# EAGLE board Funky_v3_r3 (EAGLE 6.5.0)
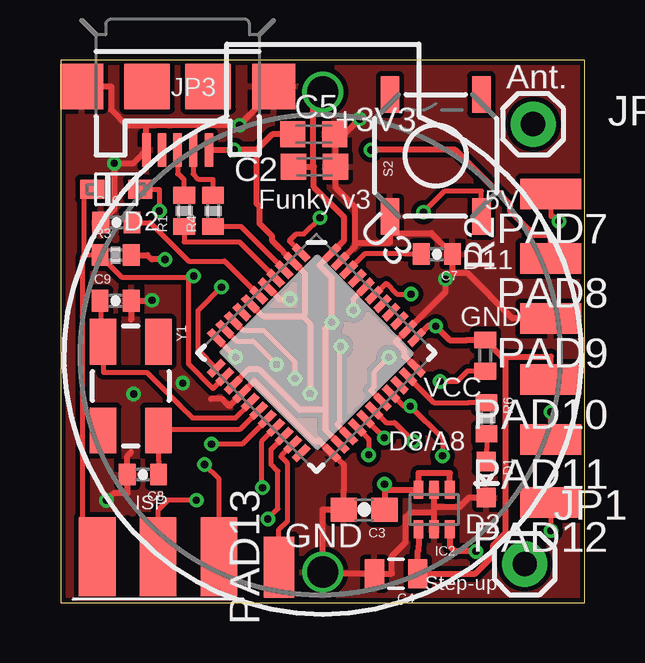
[diagram p0: board, top side]
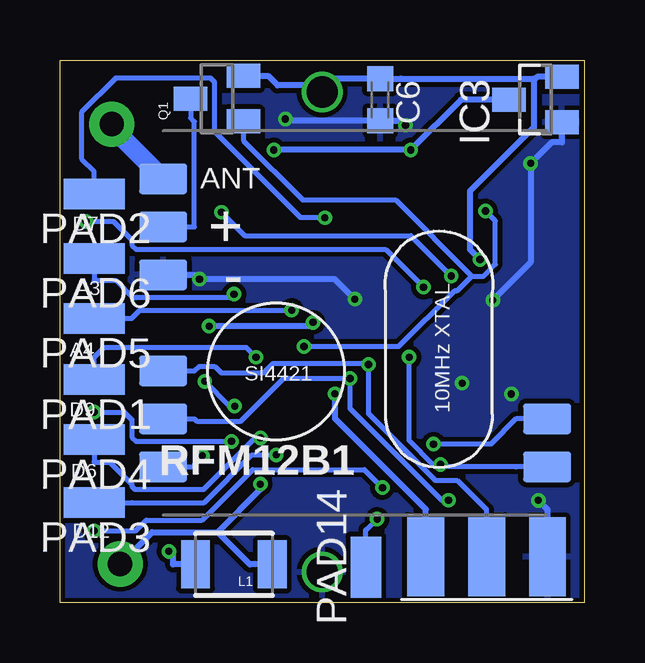
[diagram p1: board, bottom side, seen from below]

Size 21.84 x 22.61 mm. Coordinates in mm from the lower left corner, seen from the top.
Outline: 0,0 21.84,0 21.84,22.61 0,22.61 0,0
Copper layers (1*16): Top 0.035mm / dielectric 1.5mm / Bottom 0.035mm
Design rules "default": minimum track width 0.2mm, minimum drill 0.3mm, track to track 0.2mm, track to pad 0.2mm, pad to pad 0.2mm, via to via 0.2mm, smd to smd 0.2mm, copper to edge 0.2mm, drill to drill 0.2mm, minimum pad ring 0.2mm, minimum via ring 0.15mm, stop-mask expansion 0.075mm, vias tented up to drill 0.3mm, thermal gap 0.2mm
Net classes: 1 power: width 0.254 mm, clearance 0.203 mm
tRestrict: 2 lines
bRestrict: 2 lines

## Footprints (pad centres in the part's own frame; a part is rotated, then mirrored left to right if it is on the bottom)
BATTCOM_20MM_PTH = drill 1.3: 1 20,0; 2 0,0
C0603K = smd 1.05 x 1.08: 1 -0.875,0; 2 0.875,0
0603-CAP = smd 1.1 x 1: 1 -0.85,0; 2 0.85,0
0805 = smd 0.8 x 1.2: 1 -0.9,0; 2 0.9,0
0402-CAP = smd 0.7 x 0.9: 1 -0.65,0; 2 0.65,0
LED-0603 = smd 0.8 x 0.8: A 0,-0.75; C 0,0.75
SOD-323F = smd 1 x 0.8: A -1,0; C 1,0
SC70 = smd 0.4 x 0.75: 1 -0.65,-0.825; 2 0,-0.825; 3 0.65,-0.825; 4 0.65,0.825; 5 0,0.825; 6 -0.65,0.825
SOT23 = smd 1 x 1.4: 1 -0.95,-1.1; 2 0.95,-1.1; 3 0,1.1
1X01 = drill 1.016 pad 1.88: 1 0,0
USB-MICROB = smd 0.35 x 1.4: D+ 0,2.65; D- -0.65,2.65; GND 1.3,2.65; ID 0.65,2.65; VBUS -1.3,2.65 | smd 1.8 x 1.9: MT1 -4,0; MT2 4,0 | smd 1.9 x 1.9: P$1 -1.27,0; P$2 1.27,0
1210 = smd 1.2 x 2: 1 -1.6,0; 2 1.6,0
SMD1,27-2,54 = smd 1.27 x 2.54: 1 0,0
0402-RES = smd 0.7 x 0.9: 1 -0.65,0; 2 0.65,0
R0402 = smd 0.7 x 0.9: 1 -0.65,0; 2 0.65,0
RFM12B-MINPADS = smd 2 x 1.27: ANT 8,-6; GND 8,-2; IRQ -8,4; SCK 8,4; SDI 8,2; SDO -8,6; SEL 8,6; VDD 8,-4
TACTILE_SWITCH_SMD = smd 1.524 x 0.762: 1 -2.54,1.905; 2 2.54,1.905; 3 -2.54,-1.905; 4 2.54,-1.905
QFN-44-NOPAD = smd 0.8 x 0.3: 1 -3.4,2.5; 2 -3.4,2; 3 -3.4,1.5; 4 -3.4,1; 5 -3.4,0.5; 6 -3.4,0; 7 -3.4,-0.5; 8 -3.4,-1; 9 -3.4,-1.5; 10 -3.4,-2; 11 -3.4,-2.5; 23 3.4,-2.5; 24 3.4,-2; 25 3.4,-1.5; 26 3.4,-1; 27 3.4,-0.5; 28 3.4,0; 29 3.4,0.5; 30 3.4,1; 31 3.4,1.5; 32 3.4,2; 33 3.4,2.5 | smd 0.3 x 0.8: 12 -2.5,-3.4; 13 -2,-3.4; 14 -1.5,-3.4; 15 -1,-3.4; 16 -0.5,-3.4; 17 0,-3.4; 18 0.5,-3.4; 19 1,-3.4; 20 1.5,-3.4; 21 2,-3.4; 22 2.5,-3.4; 34 2.5,3.4; 35 2,3.4; 36 1.5,3.4; 37 1,3.4; 38 0.5,3.4; 39 0,3.4; 40 -0.5,3.4; 41 -1,3.4; 42 -1.5,3.4; 43 -2,3.4; 44 -2.5,3.4
6PAD_ISP = smd 1.524 x 3.302 bottom: GND 2.54,0; MOSI 0,0; VCC -2.54,0 | smd 1.524 x 3.302: MISO -2.54,0; RST 2.54,0; SCK 0,0
CRYSTAL-SMD-5X3 = smd 1.9 x 1.1: 1 -1.85,-1.15; 2 1.85,-1.15; 3 1.85,1.15; 4 -1.85,1.15

## Placement (x,y rotation side)
BAT2  [BATTCOM_20MM_PTH]  10.92,1.27 90 top
C2  100nF  [C0603K]  10.57,18.16 0 top
C3  1µ  [0603-CAP]  12.64,3.87 180 top
C4  10µ  [0805]  13.97,1.21 180 top
C5  1uF  [C0603K]  10.54,19.51 0 top
C6  1u  [C0603K]  8.51,20.96 270 bottom
C7  100nF  [0402-CAP]  15.67,14.52 180 top
C8  22pF  [0402-CAP]  3.43,5.33 180 top
C9  22pF  [0402-CAP]  2.29,12.57 0 top
C10  1uF  [0402-CAP]  2.32,15.84 0 top
D1  Green  [LED-0603]  17.74,5.12 180 top
D2  [SOD-323F]  2.31,17.22 180 top
IC2  LTC3525  [SC70]  15.56,3.88 180 top
IC3  MCP1703CB  [SOT23]  2.03,20.96 90 bottom
JP1  M01PTH  [1X01]  19.34,1.6 0 top
JP2  M01PTH  [1X01]  19.69,19.94 0 top
JP3  USB-MICROB  [USB-MICROB]  4.87,21.51 180 top
L1  10 µH  [1210]  14.6,1.59 180 bottom
PAD1  [SMD1,27-2,54]  20.42,9.28 90 bottom
PAD2  [SMD1,27-2,54]  20.42,17.03 90 bottom
PAD3  [SMD1,27-2,54]  20.42,4.16 90 bottom
PAD4  [SMD1,27-2,54]  20.42,6.79 90 bottom
PAD5  [SMD1,27-2,54]  20.42,11.84 90 bottom
PAD6  [SMD1,27-2,54]  20.42,14.34 90 bottom
PAD7  [SMD1,27-2,54]  20.42,17.03 90 top
PAD8  [SMD1,27-2,54]  20.42,14.34 90 top
PAD9  [SMD1,27-2,54]  20.42,11.84 90 top
PAD10  [SMD1,27-2,54]  20.42,9.28 90 top
PAD11  [SMD1,27-2,54]  20.42,6.79 90 top
PAD12  [SMD1,27-2,54]  20.42,4.16 90 top
PAD13  [SMD1,27-2,54]  9.1,1.48 0 top
PAD14  [SMD1,27-2,54]  9.1,1.48 0 bottom
Q1  P-MOSFET  [SOT23]  15.3,21 90 bottom
R1  22  [0402-RES]  5.15,16.32 90 top
R2  100K  [R0402]  17.69,10.29 90 top
R3  10K  [0402-RES]  2.29,14.48 0 top
R4  22  [0402-RES]  6.35,16.32 90 top
R6  330  [0402-RES]  17.74,7.68 270 top
RFM12B1  RFM12B_MINPADS  [RFM12B-MINPADS]  9.54,11.65 180 bottom
S2  !RESET  [TACTILE_SWITCH_SMD]  15.62,18.63 90 top
U3  ATMEGA32U4  [QFN-44-NOPAD]  10.66,10.4 315 top
U$2  AVR-ISP-6-EDGE  [6PAD_ISP]  4.06,1.9 180 top
Y1  8MHz  [CRYSTAL-SMD-5X3]  2.92,9.02 270 top

## Library data of the parts
BAT2 C3 C4 C7-C10 D1 JP1 JP2 L1 Q1 R1 R3 R4 R6 U3 Y1 = SparkFun
C2 C5 C6 = rcl
D2 = adafruit
IC2 = JeeLabs
IC3 = linear
JP3 = SparkFun-Connectors; PROD_ID: CONN-09505
PAD1-PAD14 = wirepad
R2 = resistor
RFM12B1 = LowPowerLab
S2 = SparkFun-Electromechanical; PROD_ID: SWCH-08247
U$2 = avr-7

## Nets
A0: U3.36
A1: U3.37
A2: U3.38
A3: PAD6.1 U3.39
A4: PAD5.1 U3.40
A5: U3.41
AREF: C7.2 U3.42
D2: PAD12.1 U3.19
D3: RFM12B1.IRQ U3.18
D4: D2.A Q1.1 U3.25
D5: U3.31
D6: PAD4.1 U3.27
D7: PAD2.1 U3.1
D8: PAD11.1 U3.28
D9: PAD1.1 U3.29
D10: R2.1 RFM12B1.SEL U3.30
D11: PAD7.1 U3.12
D12: PAD3.1 U3.26
D13: R6.1 U3.32
D+: JP3.D+ R1.2
D-: JP3.D- R4.2
GND [power]: BAT2.2 C2.2 C3.2 C4.2 C5.2 C6.2 C7.1 C8.2 C9.2 C10.1 D1.C IC2.2 IC2.5 IC3.1 JP3.GND JP3.MT1 JP3.MT2 PAD9.1 RFM12B1.GND S2.1 U3.5 U3.15 U3.23 U3.33 U3.35 U3.43 U$2.GND
MISO: RFM12B1.SDO U3.11 U$2.MISO
MOSI: RFM12B1.SDI U3.10 U$2.MOSI
N$1: C9.1 U3.16 Y1.1
N$2: R1.1 U3.4
N$3: JP2.1 RFM12B1.ANT
N$4: C8.1 U3.17 Y1.3
N$5: C10.2 U3.6
N$6: D1.A R6.2
N$7: R4.1 U3.3
N$10: Q1.3 RFM12B1.VDD
N$13 [power]: IC2.6 L1.2
RESET: D2.C R3.1 S2.3 U3.13 U$2.RST
RXI: PAD14.1 U3.20
RXLED: U3.8
SCK: RFM12B1.SCK U3.9 U$2.SCK
TXLED: U3.22
TXO: PAD13.1 U3.21
VBUS [power]: C5.1 IC3.3 JP3.VBUS PAD8.1 U3.2 U3.7 U$2.VCC
VCC [power]: BAT2.1 C2.1 C4.1 C6.1 IC2.4 IC3.2 PAD10.1 Q1.2 R2.2 R3.2 U3.14 U3.24 U3.34 U3.44
VIN [power]: C3.1 IC2.1 IC2.3 JP1.1 L1.1

## Tracks (layer width: path | path; a pad name or v marks a point on that pad's centre or on a via)
A3  (via drill 0.3 pad 0.6)
  Top 0.2: U3.39 13.08,12.79 U3.39 | U3.39 13.56,13.3 14.01,12.85 v14.6,12.85
  Bottom 0.2: PAD6.1 20.42,13.41 19.49,13.41 18.78,12.7 14.75,12.7 v14.6,12.85
A4  (via drill 0.3 pad 0.6)
  Top 0.2: U3.40 12.19,12.64 v12.19,12.18 | U3.40 12.78,13.19 U3.40
  Bottom 0.2: PAD5.1 18.85,11.84 18.52,12.18 v12.19,12.18
AREF
  Top 0.2: 12.06,13.92 12.66,14.53 14.36,14.53 14.37,14.52 C7.2 | 12.06,13.92 U3.42 12.08,13.89 12.06,13.92
D2  (via drill 0.3 pad 0.6)
  Top 0.2: U3.19 8.37,6.7 8.37,4.83 v8.41,4.79 | v20.42,2.99 20.42,3.23 PAD12.1 | U3.19 8.98,7.29 U3.19
  Bottom 0.2: v20.42,2.99 18.68,2.99 18.24,3.43 15.93,3.43 13.82,5.54 9.16,5.54 v8.41,4.79
D3  (via drill 0.3 pad 0.6)
  Top 0.2: U3.18 | U3.18 7.57,6.6 v6.29,6.6 | U3.18 8.68,7.69 U3.18
  Bottom 0.2: RFM12B1.IRQ 2.84,7.65 3.89,6.6 v6.29,6.6
D4  (via drill 0.3 pad 0.6)
  Top 0.2: 11.96,6.97 U3.25 11.98,6.99 11.96,6.97 | 11.96,6.97 11.51,7.43 11.63,7.56 11.63,10.63 v11.67,10.67 | v4.11,16.31 4.11,17.22 D2.A
  Bottom 0.2: 4.69,13.61 4.19,13.61 3.7,14.09 3.7,15.9 v4.11,16.31 | 4.69,13.61 7.86,16.78 11.74,16.78 14.2,19.25 Q1.1 | v11.67,10.67 7.72,10.67 5.39,13 5.29,13 4.69,13.61
D6  (via drill 0.3 pad 0.6)
  Top 0.2: U3.27 v13.49,6.86 | U3.27 12.68,7.69 U3.27 | U3.27
  Bottom 0.2: v13.49,6.86 13.7,6.86 15.85,4.72 18.73,4.72 18.85,4.84 18.85,4.93 19.77,5.85 20.42,5.85 PAD4.1
D7  (via drill 0.3 pad 0.6)
  Top 0.2: U3.1 9.53,15.07 9.82,15.36 10.13,15.36 v10.81,16.04 | U3.1 10.08,14.59 U3.1
  Bottom 0.2: PAD2.1 20.42,17.96 20.96,18.5 20.96,20.42 19.53,21.85 15.57,21.85 15.4,21.68 15.4,19.62 11.82,16.04 v10.81,16.04
D8  (via drill 0.3 pad 0.6)
  Top 0.2: v14.7,6.72 13.91,7.5 13.56,7.5 U3.28 | U3.28 13.08,7.99 U3.28 | PAD11.1 v20.42,7.94
  Bottom 0.2: v20.42,7.94 19.16,7.94 18.84,7.62 18.84,6.89 18.67,6.72 v14.7,6.72
D9  (via drill 0.3 pad 0.6)
  Top 0.2: 13.38,8.39 U3.29 13.38,8.39 | 13.38,8.39 12.92,8.84 13.07,8.99 13.07,9.61 v13.68,10.22
  Bottom 0.2: PAD1.1 20.42,10.22 20.02,10.63 14.08,10.63 v13.68,10.22
D10  (via drill 0.3 pad 0.6)
  Top 0.2: v15.91,6.11 15.91,6.84 v14.57,8.18 14.29,8.18 13.78,8.69 | 13.78,8.69 U3.30 13.78,8.69 | v15.81,9.22 16.52,9.22 16.94,9.64 R2.1
  Bottom 0.2: RFM12B1.SEL 16.24,5.65 16.24,5.78 v15.91,6.11 | v15.81,9.22 14.78,8.18 v14.57,8.18
D11  (via drill 0.3 pad 0.6)
  Top 0.2: U3.12 5.72,10.53 5.72,12.17 v6.7,13.14 | v20.76,15.89 20.55,16.09 20.42,16.09 PAD7.1 | U3.12 6.58,9.79 U3.12
  Bottom 0.2: v20.76,15.89 19.62,15.89 18.85,15.11 18.85,14.9 18.67,14.72 8.27,14.72 v6.7,13.14
D12  (via drill 0.3 pad 0.6)
  Top 0.2: 12.37,7.28 U3.26 12.38,7.29 12.37,7.28 | 12.37,7.28 12.85,6.79 12.83,6.78 v12.83,6.15
  Bottom 0.2: v12.83,6.15 13.85,6.15 15.83,4.16 18.85,4.16 PAD3.1
D13
  Top 0.2: 14.49,9.4 U3.32 14.48,9.39 14.49,9.4 | 14.49,9.4 15.55,8.33 16.99,8.33 R6.1
D+
  Top 0.2: JP3.D+ 4.87,17.86 4.91,17.86 5.15,17.62 R1.2
D-
  Top 0.2: JP3.D- 5.52,17.86 5.76,17.62 6.35,17.62 R4.2
GND  (via drill 0.3 pad 0.6)
  Top 0.254: U3.5 9.12,12.64 v9.56,12.64 | 16.32,13.74 16.06,13.47 v16.03,13.47 16.03,12.95 U3.35 | U3.33 14.31,10.28 14.31,10.52 13.96,10.87 14.38,11.3 | U3.35 14.38,11.3 | JP3.MT2 2.1,21.51 2.1,20.55 2.76,19.89 3.57,19.89 | C10.1 2.23,16.4 v2.23,18.3 3.01,18.3 JP3.GND 3.57,19.89 | 3.57,19.89 v7.45,19.89 8.87,21.31 JP3.MT1 | 2.94,6.27 2.78,6.11 C8.2 2.78,4.94 2.78,4.55 2.21,4.55 v1.91,4.26 | 6.26,8.48 6.71,8.48 6.91,8.29 6.93,8.29 7.03,8.19 U3.15 | 16.32,13.74 16.93,13.74 18.82,11.84 PAD9.1 | v3.81,12.6 3.64,12.6 3.62,12.57 C9.2 2.94,11.79 | D1.C 17.01,4.37 16.62,3.99 15.56,3.99 | 15.56,3.99 IC2.2 | 15.56,3.76 15.56,3.99 | 15.56,3.76 14.57,3.76 14.38,3.56 14.38,2.51 13.8,1.94 13.8,1.21 C4.2 10.99,1.21 BAT2.2 10.91,3.87 C3.2 11.79,4.7 11.81,4.71 11.81,5.71 11.55,5.97 U3.23 | IC2.5 15.56,3.76 | 13.72,15.39 15.45,15.39 C7.1 16.32,13.74 | 13.72,15.39 13.72,15 12.27,15 | S2.1 13.72,15.39 | 12.27,15 12.27,16.48 11.45,17.29 C2.2 11.45,19.34 11.62,19.51 | 12.27,15 12.27,14.84 12.1,14.67 U3.43 | 11.62,19.51 11.81,19.51 v12.46,20.15 | C5.2 11.62,19.51 | U3.23 10.78,6.75 10.54,6.75 8.06,9.22 U3.15 | U3.23 11.28,6.19 U3.23 | 14.38,11.3 14.38,11.29 U3.35 | U3.5 8.58,13.19 U3.5 | U3.33 14.88,9.79 U3.33 | U3.15 | U3.43
  Bottom 0.254: v9.56,12.64 10.4,13.48 v16.03,13.48 v16.03,13.47 16.21,13.65 RFM12B1.GND | v3.81,12.6 2.23,14.17 v2.23,18.3 1.36,19.18 0.93,19.18 IC3.1 | v7.45,19.89 7.64,20.08 C6.2 8.77,20.08 9.38,20.08 12.39,20.08 v12.46,20.15 | U$2.GND 1.52,3.89 1.54,3.89 v1.91,4.26
  other vias: 5.09,9.14 3.04,8.69
  pour Top: -0.7,23.17 -0.7,-0.7 22.22,-0.7 22.22,23.17
  pour Bottom: -1.4,23.94 -1.4,-1.34 22.92,-1.34 22.92,24.13 -1.34,24.13
MISO  (via drill 0.3 pad 0.6)
  Top 0.2: v5.99,5.75 6.6,5.14 6.6,3.86 U$2.MISO | U3.11 v7.3,10.23 | U3.11 6.48,11.09 U3.11
  Bottom 0.2: v7.3,10.23 7.3,6.75 6.3,5.75 v5.99,5.75 5.89,5.65 2.84,5.65 RFM12B1.SDO
MOSI  (via drill 0.3 pad 0.6)
  Top 0.2: v8.99,9.92 8.02,10.89 7.33,10.89 6.86,11.37 | 6.86,11.37 U3.10 6.88,11.39 6.86,11.37
  Bottom 0.2: U$2.MOSI 4.06,3.86 5.3,5.09 6.2,5.09 8.99,7.88 v8.99,9.92 9.04,9.97 12.96,9.97 13.36,9.56 15.12,9.56 15.4,9.84 16.05,9.84 16.24,9.65 RFM12B1.SDI
N$1
  Top 0.2: U3.16 | U3.16 7.98,8.39 U3.16 | U3.16 | U3.16 7.88,8.29 7.28,7.69 5.5,7.69 4.98,8.19 3.58,9.59 1.78,9.59 1.78,10.79 Y1.1 1.68,10.89 1.68,12.49 C9.1
N$2
  Top 0.2: R1.1 5.15,15.02 7.45,15.02 8.88,13.59 | 8.88,13.59 U3.4 8.88,13.59
N$3
  Bottom 0.813: RFM12B1.ANT 19.69,19.79 JP2.1
N$4
  Top 0.2: U3.17 7.48,7.23 4.13,7.23 Y1.3 4.07,7.06 4.07,5.92 4.08,5.91 C8.1 | U3.17 8.28,7.99 U3.17
N$5
  Top 0.2: C10.2 3.73,15.84 5.34,14.22 6.83,14.22 8.18,12.88 | 8.18,12.88 U3.6 8.18,12.89 8.18,12.88
N$6
  Top 0.2: R6.2 17.74,6.38 17.74,6.37 D1.A
N$7
  Top 0.2: R4.1 7.51,15.67 9.29,13.89 | 9.29,13.89 U3.3 9.28,13.89 9.29,13.89
N$10
  Bottom 0.2: RFM12B1.VDD 16.24,15.65 16.24,20.04 16.4,20.2 Q1.3
N$13  (via drill 0.3 pad 0.6)
  Top 0.254: IC2.6 16.21,2.35 16.43,2.13 v17.31,2.13
  Bottom 0.254: L1.2 17.13,1.59 17.13,1.95 v17.31,2.13
RESET  (via drill 0.3 pad 0.6)
  Top 0.2: 5.32,13.56 5.5,13.56 v5.54,13.6 | 5.32,13.56 2.56,13.56 R3.1 0.99,14.48 | 5.32,13.56 5.32,9.94 6.34,8.91 U3.13 | S2.3 17.53,17.15 16.01,17.15 v15.12,16.26 | U$2.RST 0.92,2.51 0.92,14.41 0.99,14.48 | 0.99,14.48 0.99,16.89 D2.C | U3.13 6.88,9.49 U3.13
  Bottom 0.2: v15.12,16.26 14.15,15.29 7.23,15.29 v5.54,13.6
RXI  (via drill 0.3 pad 0.6)
  Top 0.2: v8.63,3.48 9.05,3.9 9.05,5.47 8.77,5.76 8.77,6.39 U3.20 | U3.20 9.38,6.99 U3.20
  Bottom 0.2: v8.63,3.48 9.06,3.05 9.1,3.05 PAD14.1
SCK  (via drill 0.3 pad 0.6)
  Top 0.2: U$2.SCK 4.06,3.86 4.47,4.26 v5.66,4.26 | U3.9 7.58,11.35 8.45,11.35 9.76,10.04 v9.76,9.34 | U3.9 7.18,11.79 U3.9
  Bottom 0.2: v5.66,4.26 5.94,4.26 9.76,8.09 v9.76,9.34 12.53,9.34 14.3,7.56 16.15,7.56 16.24,7.65 RFM12B1.SCK
TXO
  Top 0.2: PAD13.1 9.1,3.05 9.45,3.4 9.45,5.8 9.17,6.09 U3.21 | U3.21 9.68,6.59 U3.21
VBUS  (via drill 0.3 pad 0.6)
  Top 0.254: 10.08,11.93 10.19,12.04 10.19,13.7 10.18,13.7 9.69,14.2 | 10.08,11.93 10.39,11.62 v10.39,8.7 | v12.93,18.86 16.45,18.86 18.72,16.58 18.72,16.31 19.73,15.3 20.42,15.3 PAD8.1 | 8.16,18.86 v7.23,18.86 JP3.VBUS | 8.16,18.86 8.81,19.51 C5.1 | 8.16,18.86 8.16,16.62 8.29,16.49 8.29,15.79 8.81,15.27 8.81,15.08 9.15,14.73 9.41,14.48 U3.2 | 10.08,11.93 8.42,11.93 U3.7 | U3.2 9.69,14.2 | U3.7 7.88,12.49 U3.7 | 9.69,14.2 9.68,14.19 U3.2
  Bottom 0.254: v10.39,8.7 10.39,7.67 6.6,3.89 U$2.VCC | v12.93,18.86 v7.23,18.86 5.13,20.96 IC3.3
VCC  (via drill 0.3 pad 0.6)
  Top 0.254: 11.02,8.03 11.02,7.21 U3.24 | 11.02,8.03 11.02,11.4 v11.3,11.68 11.3,13.53 10.78,14.05 U3.44 | 11.02,8.03 9.96,8.03 8.28,9.71 7.85,9.71 U3.14 | R3.2 3.62,14.48 3.8,14.3 v4.35,14.3 | 10.52,18.16 10.52,20.87 BAT2.1 | 10.52,18.16 10.55,18.16 10.55,17.31 11.81,16.05 11.81,15.09 U3.44 | 10.52,18.16 10.43,18.16 C2.1 | 18.55,10.25 18.55,2.91 18.01,2.38 18.01,1.94 17.27,1.21 C4.1 14.87,2.14 14.91,2.17 14.91,2.35 IC2.4 | 14.88,11.09 U3.34 14.88,11.09 | 14.88,11.09 15.35,11.55 15.59,11.55 v15.63,11.52 16.21,10.94 16.91,10.94 R2.2 18.38,10.25 18.55,10.25 | 18.55,10.25 20.42,10.25 PAD10.1 | U3.44 11.28,14.59 U3.44 | 14.88,11.09 | U3.24
  Bottom 0.254: v11.3,11.68 11.46,11.52 v15.63,11.52 | 2.1,21.83 2.1,19.8 4.76,17.14 4.76,14.71 v4.35,14.3 | 2.1,21.83 2.04,21.83 1.96,21.91 IC3.2 | 2.1,21.83 7.64,21.83 8.07,21.83 C6.1 10.64,21.83 10.92,21.55 | 10.92,21.55 12.78,21.55 13.17,21.95 Q1.2 | 10.92,21.55 BAT2.1
VIN  (via drill 0.3 pad 0.6)
  Top 0.254: 13.49,4.7 v13.49,4.93 | 13.49,4.7 C3.1 | 13.49,4.7 IC2.3 14.91,5.41 16.21,5.41 IC2.1
  Bottom 0.254: 15.27,2.93 13.49,4.71 v13.49,4.93 | v13.49,4.93 | JP1.1 18.01,2.93 15.27,2.93 | 15.27,2.93 13.93,1.59 L1.1

## Text on the board
tPlace: Ant. | +3V3 | Funky v3 | 5V | D11 | GND | VCC | D8/A8 | ISP | GND | D2 | Step-up
bPlace: D7 | A3 | A4 | D9 | D6 | D12